# Altium PCB Placa_Base.PcbDoc
Units mm, origin at the board's own origin, x right, y up, seen from the top; angles counter-clockwise.
Board outline 199.9 x 199.9 mm, 2 copper layers (Top Layer, Bottom Layer); 112 components, 106 nets, 340 pads, 0 vias.
Unrouted connection lines stored in the file: 231.
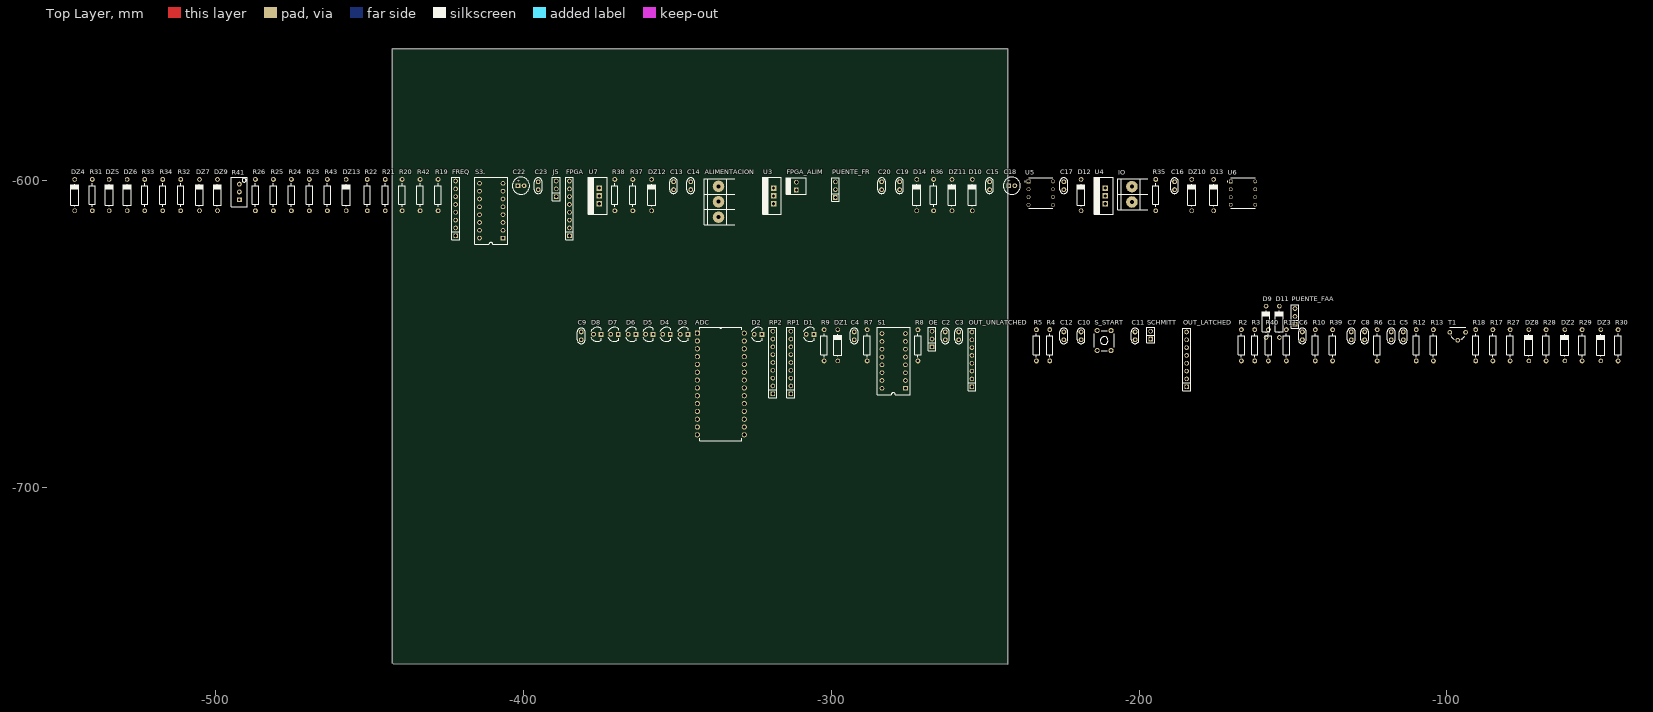
[diagram p0: Top Layer view]
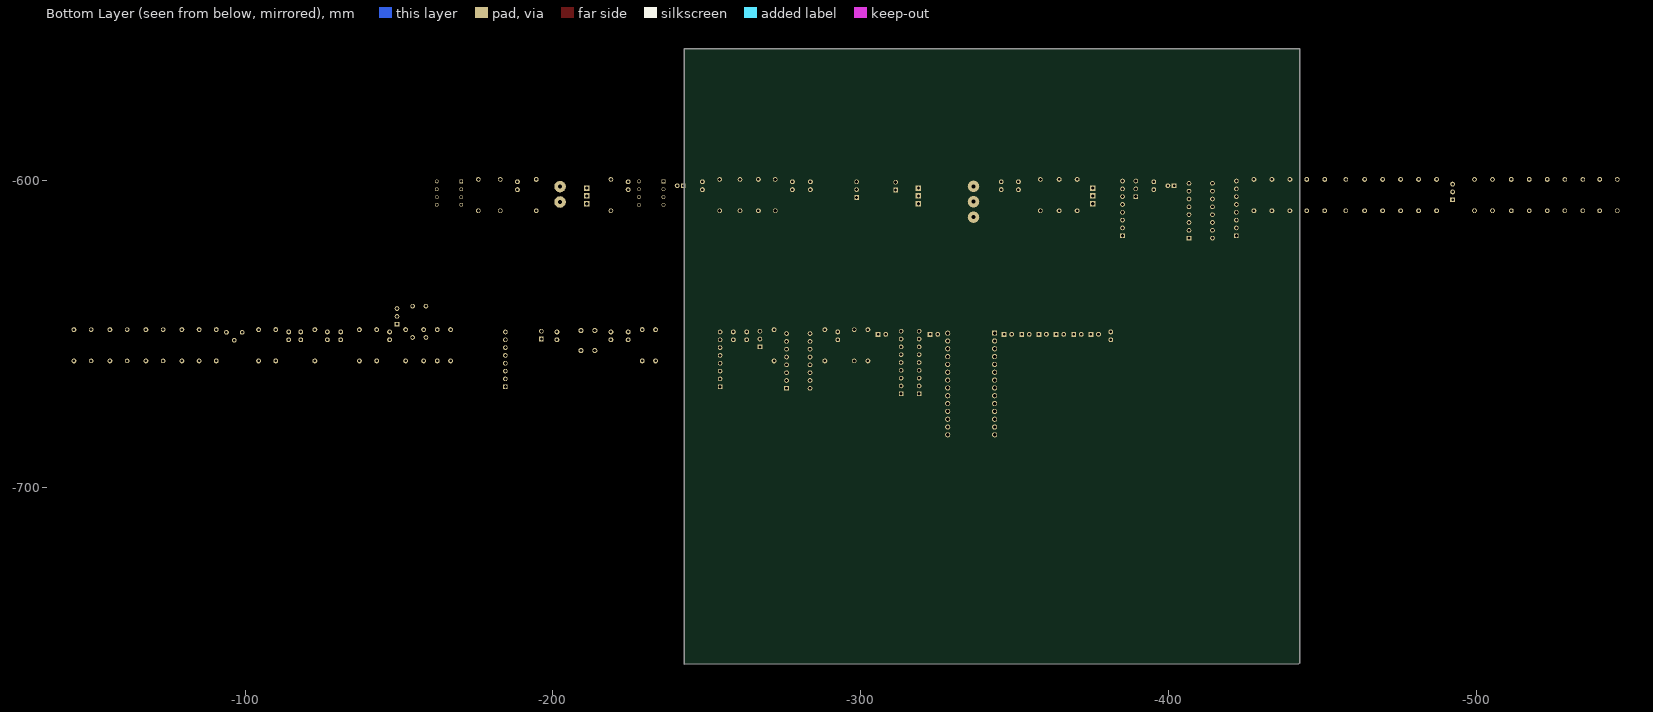
[diagram p1: Bottom Layer view, seen from below]

## Layer stack, top to bottom
Top Solder: solder mask 0.0102, Solder Resist, Dk 3.5
Top Layer: signal copper 0.0356
Dielectric 1: dielectric 0.32, FR-4, Dk 4.8
Bottom Layer: signal copper 0.0356
Bottom Solder: solder mask 0.0102, Solder Resist, Dk 3.5

## Board outline
-242.57,-757.301 -242.57,-557.403 -442.468,-557.403 -442.468,-756.793 -442.214,-757.047

## Design rules (kind name [scope] priority, off if disabled: settings)
Clearance [All] p1: gap=0.254
PolygonConnect [All] p1: connectstyle=Relief reliefconductorwidth=0.254 reliefentries=4 polygonreliefangle="90 Angle" airgapwidth=0.254
RoomDefinition Placa_Base [InComponentClass('Placa_Base')] p1: confinementstyle=ConfineIn formatcopy=TRUE lockcomponents=FALSE outline -382.651,-700.913 371.983,-700.913 371.983,-645.033 -382.651,-645.033
RoutingVias [All] p1: holewidth=0.711 width=1.27 viastyle="Through Hole" minholewidth=0.711 minwidth=1.27 maxholewidth=0.711 maxwidth=1.27
SolderMaskExpansion [All] p1: expansion=0.102
Width [All] p1: maxlimit=0.254 minlimit=0.254 preferedwidth=0.254
30 further rules are at their usual default settings.

## Components (designator, comment, footprint, x,y, rotation, side; value= is the part's Value field where it differs from the comment)
ADC "ADC0808CCN" *DIP254P1524X483-28 -328.168,-682.752 r0 top
ALIMENTACION "BORNERA 3" BORNERA3 -336.55,-607.06 r0 top
C1 "100n" CAP100 -118.11,-650.621 r90 top
C2 "100n" CAP100 -262.89,-650.621 r90 top
C3 "100n" CAP100 -258.572,-650.621 r90 top
C4 "10n" CAP100 -292.481,-650.621 r90 top
C5 "100n" CAP100 -114.173,-650.621 r90 top
C6 "100n" CAP100 -146.939,-650.621 r90 top
C7 "100n" CAP100 -131.064,-650.621 r90 top
C8 "10n" CAP100 -126.746,-650.621 r90 top
C9 "100n" CAP100 -381.127,-650.621 r90 top
C10 "10n" CAP100 -218.821,-650.621 r90 top
C11 "100n" CAP100 -201.295,-650.621 r90 top
C12 "100n" CAP100 -224.409,-650.621 r90 top
C13 "330n" CAP100 -351.155,-601.853 r90 top
C14 "100n" CAP100 -345.567,-601.853 r90 top
C15 "100n" CAP100 -248.539,-601.853 r90 top
C16 "100n" CAP100 -188.468,-601.853 r90 top
C17 "100n" CAP100 -224.409,-601.853 r90 top
C18 "10u" CAP100RP -241.3,-601.853 r0 top
C19 "100n" CAP100 -277.749,-601.853 r90 top
C20 "100n" CAP100 -283.591,-601.853 r90 top
C22 "2.2u" CAP100RP -400.685,-601.853 r0 top
C23 "1u" CAP100 -395.097,-601.853 r90 top
D1 "LED" LED3 -306.832,-650.113 r0 top
D2 "LED" LED3 -323.723,-650.113 r0 top
D3 "LED" LED3 -347.726,-650.113 r0 top
D4 "LED" LED3 -353.441,-650.113 r0 top
D5 "LED" LED3 -359.029,-650.113 r0 top
D6 "LED" LED3 -364.617,-650.113 r0 top
D7 "LED" LED3 -370.332,-650.113 r0 top
D8 "LED" LED3 -375.92,-650.113 r0 top
D9 "DIODO" DO41 -158.75,-646.049 r90 top
D10 "DIODO" DO41 -254.127,-604.901 r90 top
D11 "DIODO" DO41 -154.432,-646.049 r90 top
D12 "DIODO" DO41 -218.821,-604.901 r90 top
D13 "DIODO" DO41 -175.768,-604.901 r90 top
D14 "DIODO" DO41 -272.161,-604.901 r90 top
DZ1 "3.3V" DO41 -297.815,-653.669 r90 top
DZ2 "3.6V" DO41 -61.722,-653.669 r90 top
DZ3 "3.6V" DO41 -50.038,-653.669 r90 top
DZ4 "3.6V" DO41 -545.592,-604.901 r90 top
DZ5 "3.6V" DO41 -534.416,-604.901 r90 top
DZ6 "3.6V" DO41 -528.574,-604.901 r90 top
DZ7 "3.6V" DO41 -505.079,-604.901 r90 top
DZ8 "3.6V" DO41 -73.406,-653.669 r90 top
DZ9 "3.6V" DO41 -499.237,-604.901 r90 top
DZ10 "5.6V" DO41 -182.88,-604.901 r90 top
DZ11 "5.6V" DO41 -260.731,-604.901 r90 top
DZ12 "3.6V" DO41 -358.267,-604.901 r90 top
DZ13 "3.6V" DO41 -457.454,-604.901 r90 top
FPGA "CON8" SIP8 -384.937,-618.109 r90 top
FPGA_ALIM "MOLEX2" MOLEX2 -311.277,-603.25 r90 top
FREQ "CON8" SIP8 -421.894,-618.109 r90 top
IO "BORNERA 2" BORNERA2 -202.311,-604.647 r0 top
J5 "SAR/MOD" JUMPER3 -389.255,-602.869 r90 top
OE "JUMPER" JUMPER3 -267.208,-651.637 r90 top
OUT_LATCHED "CON8" SIP8 -184.531,-667.131 r90 top
OUT_UNLATCHED "CON8" SIP8 -254.254,-667.131 r90 top
PUENTE_FAA "JUMPER" JUMPER3 -149.352,-644.271 r90 top
PUENTE_FR "JUMPER" JUMPER3 -298.577,-603.123 r90 top
R2 "1K5" RES400 -166.751,-658.749 r90 top
R3 "1K" RES400 -162.433,-658.749 r90 top
R4 "5K" RES400 -228.981,-658.749 r90 top
R5 "5K" RES400 -233.299,-658.749 r90 top
R6 "1K" RES400 -122.682,-658.749 r90 top
R7 "560" RES400 -288.29,-658.749 r90 top
R8 "1K" RES400 -271.78,-658.749 r90 top
R9 "1K" RES400 -302.26,-658.749 r90 top
R10 "5K" RES400 -142.748,-658.749 r90 top
R11 "5K" RES400 -152.146,-658.749 r90 top
R12 "1K" RES400 -109.982,-658.749 r90 top
R13 "1k5" RES400 -104.394,-658.749 r90 top
R17 "2k2" RES400 -85.09,-658.749 r90 top
R18 "6k8" RES400 -90.678,-658.749 r90 top
R19 "10k" RES400 -427.609,-609.981 r90 top
R20 "10k" RES400 -439.293,-609.981 r90 top
R21 "10k" RES400 -444.754,-609.981 r90 top
R22 "10k" RES400 -450.596,-609.981 r90 top
R23 "10k" RES400 -469.392,-609.981 r90 top
R24 "10k" RES400 -475.234,-609.981 r90 top
R25 "10k" RES400 -481.076,-609.981 r90 top
R26 "10k" RES400 -486.918,-609.981 r90 top
R27 "22k" RES400 -79.502,-658.749 r90 top
R28 "22k" RES400 -67.818,-658.749 r90 top
R29 "22k" RES400 -56.134,-658.749 r90 top
R30 "22k" RES400 -44.45,-658.749 r90 top
R31 "22k" RES400 -539.877,-609.981 r90 top
R32 "22k" RES400 -511.175,-609.981 r90 top
R33 "22k" RES400 -522.859,-609.981 r90 top
R34 "22k" RES400 -517.017,-609.981 r90 top
R35 "10k" RES400 -194.564,-609.981 r90 top
R36 "10k" RES400 -266.7,-609.981 r90 top
R37 "20k" RES400 -364.363,-609.981 r90 top
R38 "10k" RES400 -370.205,-609.981 r90 top
R39 "TBD" RES400 -137.16,-658.749 r90 top
R40 "TBD" RES400 -157.988,-658.749 r90 top
R41 "PRESET" "PRESET V" -492.125,-603.885 r90 top
R42 "10K" RES400 -433.451,-609.981 r90 top
R43 "20K" RES400 -463.55,-609.981 r90 top
RP1 "R-PACK 8+1" RESNET8+1 -313.055,-669.417 r90 top
RP2 "R-PACK 8+1" RESNET8+1 -318.897,-669.417 r90 top
S1 "SW-DIP8" DIP-16-KEY -275.844,-667.639 r90 top
S3. "SW-DIP8" DIP-16-KEY -406.527,-618.871 r90 top
S_START "TACT SWITCH" TACTSWITCH -211.328,-652.145 r0 top
SCHMITT "JUMPER" JUMPER2 -196.215,-650.367 r90 top
T1 "TRANSISTOR NPN" TO92 -96.52,-650.748 r0 top
U3 "7805" "TO-220 V" -318.643,-605.155 r90 top
U4 "MC33269" "TO-220 V" -210.947,-605.155 r90 top
U5 "MAX297CPA" *DIP794W47P254L991H457Q8 -231.902,-604.266 r0 top
U6 "MAX297CPA" *DIP794W47P254L991H457Q8 -166.243,-604.266 r0 top
U7 "79XX" "TO-220 V" -375.285,-605.155 r90 top

## Footprints (in the part's own frame and the unit in brackets; to place one, negate y for a bottom-side part, rotate by r counter-clockwise, add the part's x,y. Pads: shape width x height; smd on the part's side, far side on the other; paste and mask are expansions set on the pad)
*DIP254P1524X483-28 [mil]
  rect 66x66 hole 44: 1(-600,1300)
  round 66 hole 44: 2(-600,1200) 3(-600,1100) 4(-600,1000) 5(-600,900) 6(-600,800) 7(-600,700) 8(-600,600) 9(-600,500) 10(-600,400) 11(-600,300) 12(-600,200) 13(-600,100) 14(-600,0) 15(0,0) 16(0,100) 17(0,200) 18(0,300) 19(0,400) 20(0,500) 21(0,600) 22(0,700) 23(0,800) 24(0,900) 25(0,1000) 26(0,1100) 27(0,1200) 28(0,1300)
  silkscreen extent -570,-75 -30,1375
*DIP794W47P254L991H457Q8 [mm]
  rect 1.21x1.21 hole 0.86: 1(-3.97,3.81)
  round 1.21 hole 0.86: 2(-3.97,1.27) 3(-3.97,-1.27) 4(-3.97,-3.81) 5(3.97,-3.81) 6(3.97,-1.27) 7(3.97,1.27) 8(3.97,3.81)
  silkscreen extent -5.17,-4.95 3.94,4.95
BORNERA2 [mm] "Bornera con Tornillos 5mm separación"
  round 3.75 hole 1.3: 1(0,2.5) 2(0,-2.5)
  silkscreen extent -4.6,-5 5.2,5, body extent -3.76,-4.89 3.94,5.61, height 10
BORNERA3 [mm] "Bornera con Tornillos 5mm separación"
  round 3.75 hole 1.3: 1(0,5) 2(0,0) 3(0,-5)
  silkscreen extent -4.6,-7.5 5.2,7.5, body extent -3.76,-7.39 3.94,8.11, height 10.05
CAP100 [mil]
  round 62 hole 32: 1(-50,0) 2(50,0)
  silkscreen extent -100,-50 100,50, body extent -115,-33 115,34, height 241
CAP100RP [mil] "Body diameter 5mm"
  rect 60x60 hole 30: 1(-39.37,0)
  round 60 hole 30: 2(39.37,0)
  silkscreen extent -110,-110 110,110, body extent -99,-99 99,100, height 454
DIP-16-KEY [mm] "DIP; 16 Leads; Row Spacing 7.62 mm; Pitch 2.54 mm"
  rect 1.5x1.5 hole 0.9: 1(0,0)
  round 1.5 hole 0.9: 2(2.54,0) 3(5.08,0) 4(7.62,0) 5(10.16,0) 6(12.7,0) 7(15.24,0) 8(17.78,0) 9(17.78,7.62) 10(15.24,7.62) 11(12.7,7.62) 12(10.16,7.62) 13(7.62,7.62) 14(5.08,7.62) 15(2.54,7.62) 16(0,7.62)
  silkscreen extent -2.05,-1.59 19.83,9.2
DO41 [mm]
  round 1.5 hole 1.016: 1(-5.08,0) 2(5.08,0)
  silkscreen extent -3.56,-1.27 3.56,1.27, body extent -5.46,-1.19 5.46,1.37, height 2.03
JUMPER2 [mm]
  rect 1.5x1.5 hole 1.016: 1(-1.27,0)
  round 1.5 hole 1.016: 2(1.27,0)
  silkscreen extent -2.54,-1.27 2.54,1.27, body extent -2.46,-1.27 2.54,1.27, height 9.5
JUMPER3 [mm]
  rect 1.5x1.5 hole 1.016: 1(-2.54,0)
  round 1.5 hole 1.016: 2(0,0) 3(2.54,0)
  silkscreen extent -3.81,-1.27 3.81,1.27, body extent -3.81,-1.3 3.81,1.27, height 16.15
LED3 [mil]
  round 62 hole 32: 1(-48,0)
  rect 62x62 hole 32: 2(49,0)
  silkscreen extent -84,-90 54,90, body extent -65,-64 65,65, height 19
MOLEX2 [mm]
  rect 1.5x1.5 hole 1.016: 1(0,0)
  round 1.5 hole 1.016: 2(2.54,0)
  silkscreen extent -1.4,-3.3 3.94,3.3, body extent -1.27,-3.17 3.81,3.18, height 10.74
"PRESET V" [mil]
  rect 62x62 hole 32: 1(-100,0)
  round 62 hole 32: 2(0,0) 3(100,0)
  silkscreen extent -188,-102 188,102, body extent -185,-95 190,95, height 455
RES400 [mil]
  round 62 hole 32: 1(0,0) 2(400,0)
  silkscreen extent 50,-40 350,40, body extent -12,-45 412,46, height 96
RESNET8+1 [mm]
  rect 1.5x1.5 hole 1.016: 1(0,0)
  round 1.5 hole 1.016: 2(2.54,0) 3(5.08,0) 4(7.62,0) 5(10.16,0) 6(12.7,0) 7(15.24,0) 8(17.78,0) 9(20.32,0)
  silkscreen extent -1.27,-1.27 21.59,1.27, body extent -1.09,-0.64 21.41,0.62, height 5.3
SIP8 [mm]
  rect 1.5x1.5 hole 1.016: 1(0,0)
  round 1.5 hole 1.016: 2(2.54,0) 3(5.08,0) 4(7.62,0) 5(10.16,0) 6(12.7,0) 7(15.24,0) 8(17.78,0)
  silkscreen extent -1.27,-1.27 19.05,1.27, body extent -1.27,-1.27 19.05,1.27, height 8.38
TACTSWITCH [mil]
  round 65 hole 40: 1(-88.58,-127.95) 2(-88.58,127.95) 3(88.58,-127.95) 4(88.58,127.95)
  silkscreen extent -128,-128 128,128, body extent -120,-156 124,156, height 276
TO92 [mil]
  round 60 hole 32: 1(0,-50) 2(100,50) 3(-100,50)
  silkscreen extent -100,-39 100,115, body extent -110,-61 110,110, height 315
"TO-220 V" [mil]
  rect 70x70 hole 40: 1(-100,0) 2(0,0) 3(100,0)
  silkscreen extent -232,-100 240,139, body extent -197,-79 197,118, height 709

## Part data
ADC: "8-bit Microprocessor Compatible A/D Converters With 8-Channel Multiplexer, 28-pin MDIP"
C1 C2 C3 C4 C5 C6 C7 C8 C9 C10 C11 C12 C13 C14 C15 C16 C17 C19 C20 C23: library part CAP
C18 C22: library part CAPPOL
DZ1 DZ2 DZ3 DZ4 DZ5 DZ6 DZ7 DZ8 DZ9 DZ10 DZ11 DZ12 DZ13: library part "DIODO ZENER"
J5 OE PUENTE_FAA PUENTE_FR: library part JUMPER3
R2 R3 R4 R5 R6 R7 R8 R9 R10 R11 R12 R13 R17 R18 R19 R20 R21 R22 R23 R24 R25 R26 R27 R28 R29 R30 R31 R32 R33 R34 R35 R36 R37 R38 R39 R40 R42 R43: library part RES
S1 S3.: "4009 Series DIP Switch, Raised actuator"
U3 U4: library part 78XX, "REGULDOR POSITIVO"
U5 U6: "Active Filter Single SW-CAP Low Pass 8th Order 50kHz 8-Pin PDIP N"
U7: "REGULADOR NEGATIVO"

## Nets (pads, with @x,y where several pads share a name; then routed paths per layer and width w, separated by ;. In a path a pad name is that pad's centre, name@x,y a point inside that pad or via, vN(x,y) a via of type N, cw(c..) or ccw(c..) an arc to the next point about the centre after c; other vN are vias at no path point)
B0: RP1.2 RP1.7 RP1.9 S1.9 S1.14 S1.16
B1: RP1.3 S1.10
B2: RP1.4 S1.11
B3: RP1.5 S1.12
B4: RP1.6 S1.13
B6: RP1.8 S1.15
CLK_9FS: FPGA.6 T1.3
CLK_DAC: ADC.10 R18.1 T1.2
CLK_FILTRO: FPGA.7 U5.1 U6.1
FPGA_OE: DZ1.2 R7.1 R38.1
FR_IN: D10.2 D12.1 PUENTE_FR.1 R13.2 U5.8
GND: ADC.1 ADC.2 ADC.3 ADC.4 ADC.5 ADC.13 ADC.16 ADC.23 ADC.24 ADC.25 ADC.27 ADC.28 ALIMENTACION.2 C1.2 C2.1 C3.1 C5.2 C6.2 C7.2 C8.2 C9.2 C11.1 C12.1 C13.2 C14.2 C15.2 C16.2 C17.1 C18.2 C19.2 C20.2 C22.1 C23.2 D9.1 D10.1 D13.1 D14.2 DZ1.1 DZ2.1 DZ3.1 DZ4.1 DZ5.1 DZ6.1 DZ7.1 DZ8.1 DZ9.1 DZ10.1 DZ11.2 DZ12.1 DZ13.1 FPGA_ALIM.2 J5.1 R5.2 R8.1 R9.1 R11.1 R27.1 R28.1 R29.1 R30.1 R31.1 R32.1 R33.1 R34.1 R35.1 R36.1 R37.2 R41.1 R43.1 RP1.1 RP2.1 U3.2 U4.2 U5.6 U6.6 U7.1
NetADC_8: ADC.8
NetADC_14: ADC.14
NetADC_15: ADC.15
NetADC_17: ADC.17
NetADC_18: ADC.18
NetADC_19: ADC.19
NetADC_20: ADC.20
NetADC_21: ADC.21
NetC4_2: C4.2
NetC8_1: C8.1
NetC10_1: C10.1
NetCOMP_2: R39.2 SCHMITT.1
NetCOMP_3: R2.1
NetD1_1: D1.1
NetD1_2: D1.2 RP2.9
NetD2_1: D2.1
NetD2_2: D2.2 RP2.8
NetD3_1: D3.1
NetD3_2: D3.2 RP2.7
NetD4_1: D4.1
NetD4_2: D4.2 RP2.6
NetD5_1: D5.1
NetD5_2: D5.2 RP2.5
NetD6_1: D6.1
NetD6_2: D6.2 RP2.4
NetD7_1: D7.1
NetD7_2: D7.2 RP2.3
NetD8_1: D8.1
NetD8_2: D8.2 RP2.2
NetD9_2: D9.2 D11.1 IO.1 PUENTE_FAA.3 U6.8
NetDAC1_4: R3.2
NetDAC1_5: OUT_UNLATCHED.1
NetDAC1_6: OUT_UNLATCHED.2
NetDAC1_7: OUT_UNLATCHED.3
NetDAC1_8: OUT_UNLATCHED.4
NetDAC1_9: OUT_UNLATCHED.5
NetDAC1_10: OUT_UNLATCHED.6
NetDAC1_11: OUT_UNLATCHED.7
NetDAC1_12: OUT_UNLATCHED.8
NetDAC1_14: R4.1
NetDAC1_15: R5.1
NetDAC2_4: R12.1
NetDAC2_14: R10.2
NetDAC2_15: R11.2
NetDZ2_2: DZ2.2 FREQ.5 R23.2 R28.2
NetDZ3_2: DZ3.2 FREQ.2 R20.2 R29.2
NetDZ4_2: DZ4.2 FREQ.6 R24.2 R30.2
NetDZ5_2: DZ5.2 FREQ.3 R21.2 R31.2
NetDZ6_2: DZ6.2 FREQ.7 R25.2 R32.2
NetDZ7_2: DZ7.2 FREQ.4 R22.2 R33.2
NetDZ8_2: DZ8.2 FREQ.1 R19.2 R27.2
NetDZ9_2: DZ9.2 FREQ.8 R26.2 R34.2
NetDZ12_2: DZ12.2 FPGA.2 R37.1 R38.2
NetDZ13_2: DZ13.2 FPGA.4 R42.2 R43.2
NetFPGA_3: FPGA.3 J5.2
NetFPGA_8: FPGA.8 R41.2
NetIO_2: IO.2 PUENTE_FR.2
NetOE_3: OE.3 R7.2 R8.2
NetOUT_LATCHED_1: OUT_LATCHED.1 S1.1
NetOUT_LATCHED_2: OUT_LATCHED.2 S1.2
NetOUT_LATCHED_3: OUT_LATCHED.3 S1.3
NetOUT_LATCHED_4: OUT_LATCHED.4 S1.4
NetOUT_LATCHED_5: OUT_LATCHED.5 S1.5
NetOUT_LATCHED_6: OUT_LATCHED.6 S1.6
NetOUT_LATCHED_7: OUT_LATCHED.7 S1.7
NetOUT_LATCHED_8: OUT_LATCHED.8 S1.8
NetPUENTE_FAA_1: PUENTE_FAA.1 U6.5
NetPUENTE_FR_3: PUENTE_FR.3 U5.5
NetR2_2: R2.2 R3.1
NetR12_2: R12.2 R13.1
NetR17_1: R17.1 T1.1
NetR19_1: R19.1 S3..16
NetR20_1: R20.1 S3..15
NetR21_1: R21.1 S3..14
NetR22_1: R22.1 S3..13
NetR23_1: R23.1 S3..12
NetR24_1: R24.1 S3..11
NetR25_1: R25.1 S3..10
NetR26_1: R26.1 S3..9
NetR40_1: R40.1 SCHMITT.2
NetU5_3: U5.3 U5.4
NetU6_3: U6.3 U6.4
OE_ADC: ADC.9 OE.1 R9.2
OUT_COMP: R6.1 R40.2 R42.1
SH_CONTROL: FPGA.5
SH_IN: PUENTE_FAA.2
SH_OUT: ADC.26 R39.1
START/EOC: ADC.6 ADC.7 ADC.22 S_START.1
VCC_3.3: C18.1 J5.3 R6.2 R17.2 R41.3 S3..1 S3..2 S3..3 S3..4 S3..5 S3..6 S3..7 S3..8 U4.3
VCC_5: ADC.11 ADC.12 C9.1 C14.1 C16.1 C17.2 D11.2 D12.2 D13.2 DZ10.2 FPGA_ALIM.1 OE.2 R18.2 R35.2 S_START.3 U3.3 U5.7 U6.7
VCC_10: ALIMENTACION.3 C1.1 C3.2 C5.1 C7.1 C11.2 C13.1 R4.2 R10.1 U3.1 U4.1
VDD: 
VEE_5: C19.1 C20.1 C23.1 D14.1 DZ11.1 R36.2 U5.2 U6.2 U7.3
VEE_10: ALIMENTACION.1 C2.2 C4.1 C6.1 C10.2 C12.2 C22.2 U7.2
pads on no net: C15.1 FPGA.1 S_START.2 S_START.4

## Text inside footprints (layer, text, board x,y; h text height)
C18: Top Overlay "+" at -242.748,-600.685 h1.02
C22: Top Overlay "+" at -402.133,-600.685 h1.02